# Altium PCB Wi-FiR.PcbDoc (part 1 of 3)
Units mm, origin at the board's own origin, x right, y up, seen from the top; angles counter-clockwise.
Board outline 58.03 x 53.68 mm, 2 copper layers (Top Layer, Bottom Layer); 105 components, 77 nets, 361 pads, 200 vias.
Unrouted connection lines stored in the file: 1.
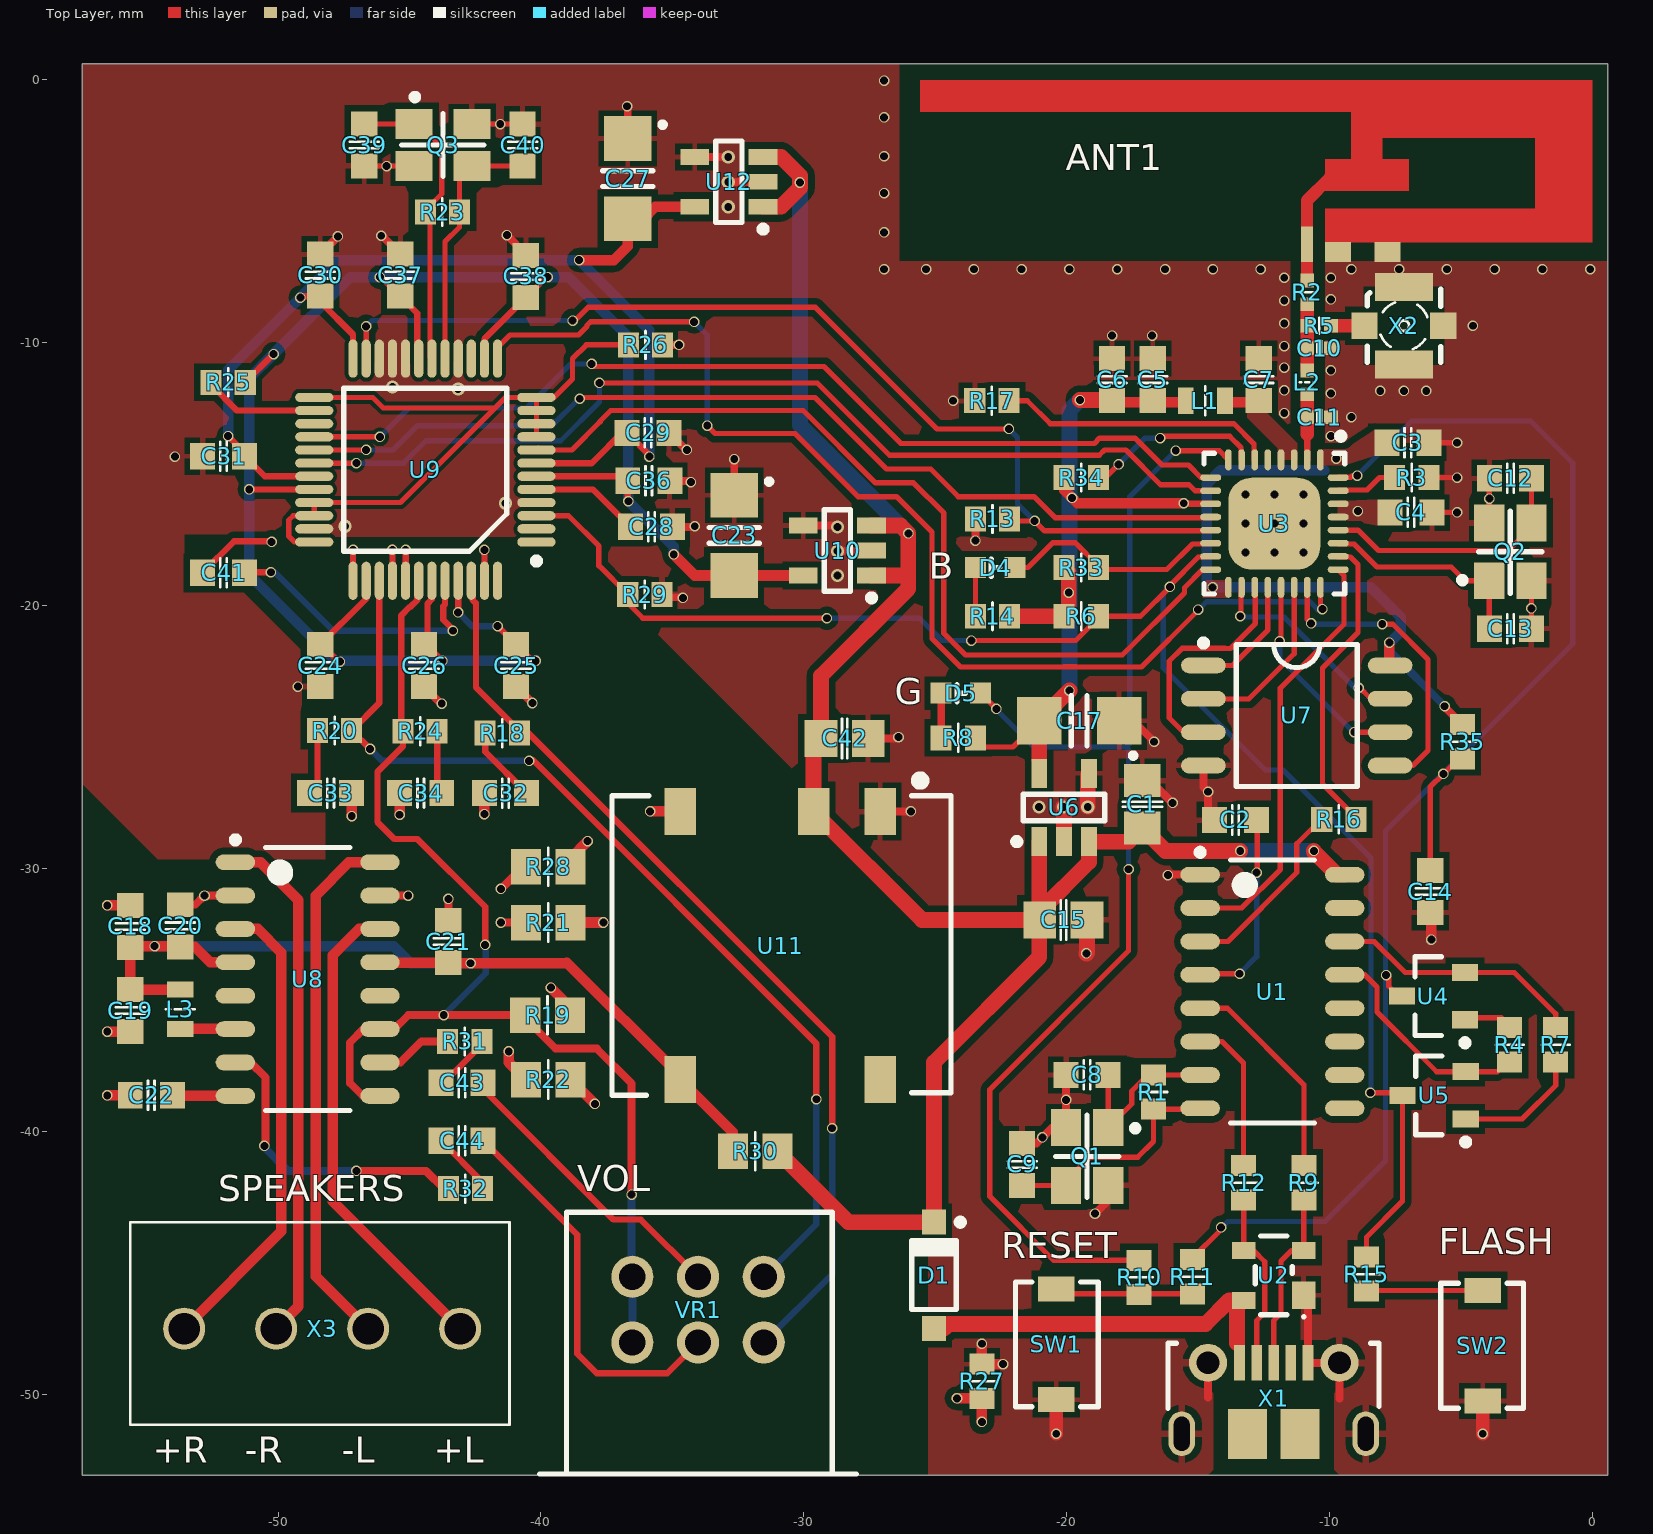
[diagram p0: Top Layer view]
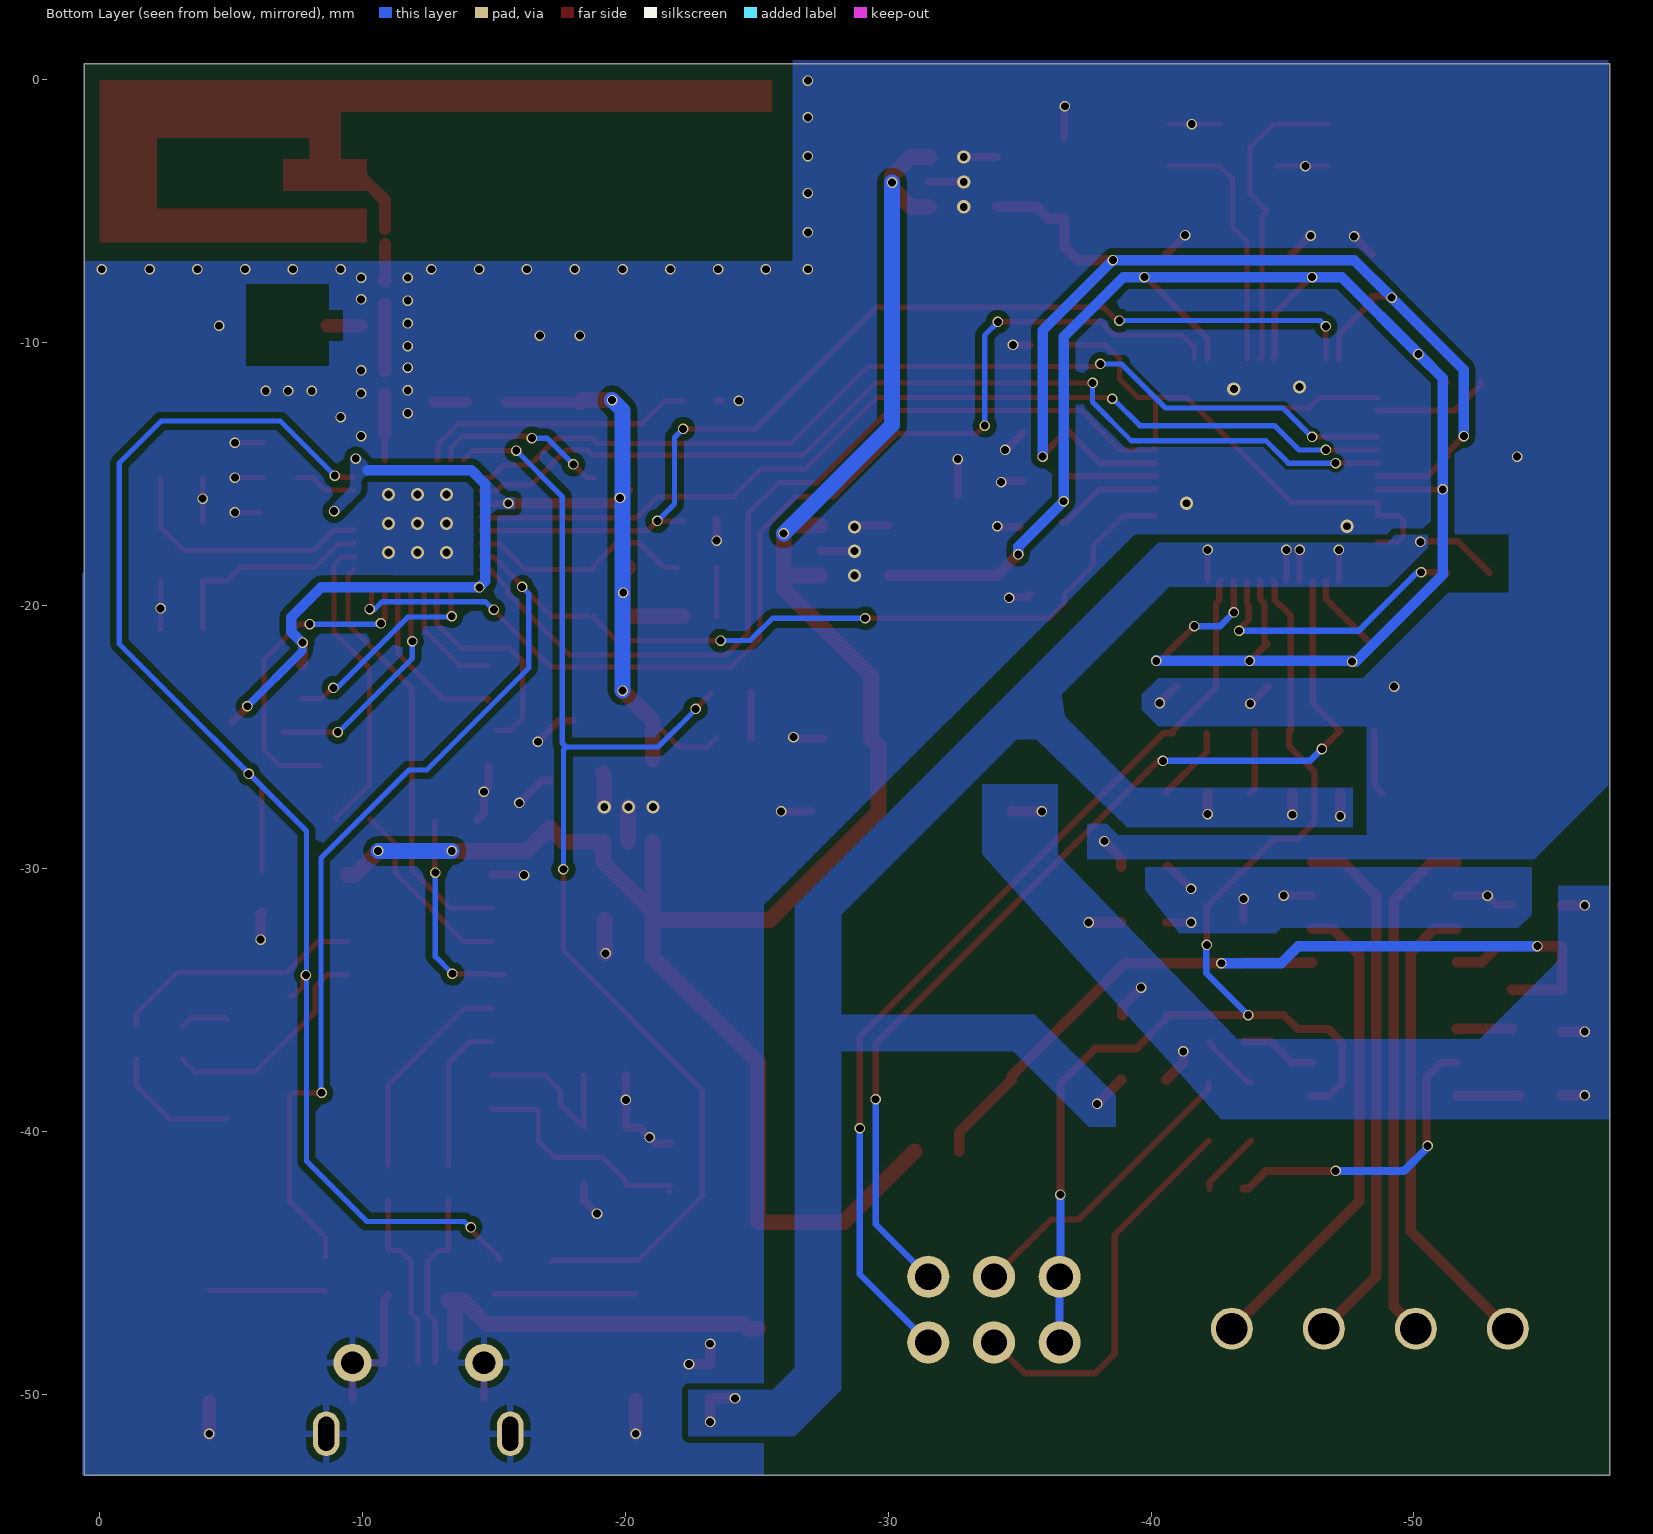
[diagram p1: Bottom Layer view, seen from below]
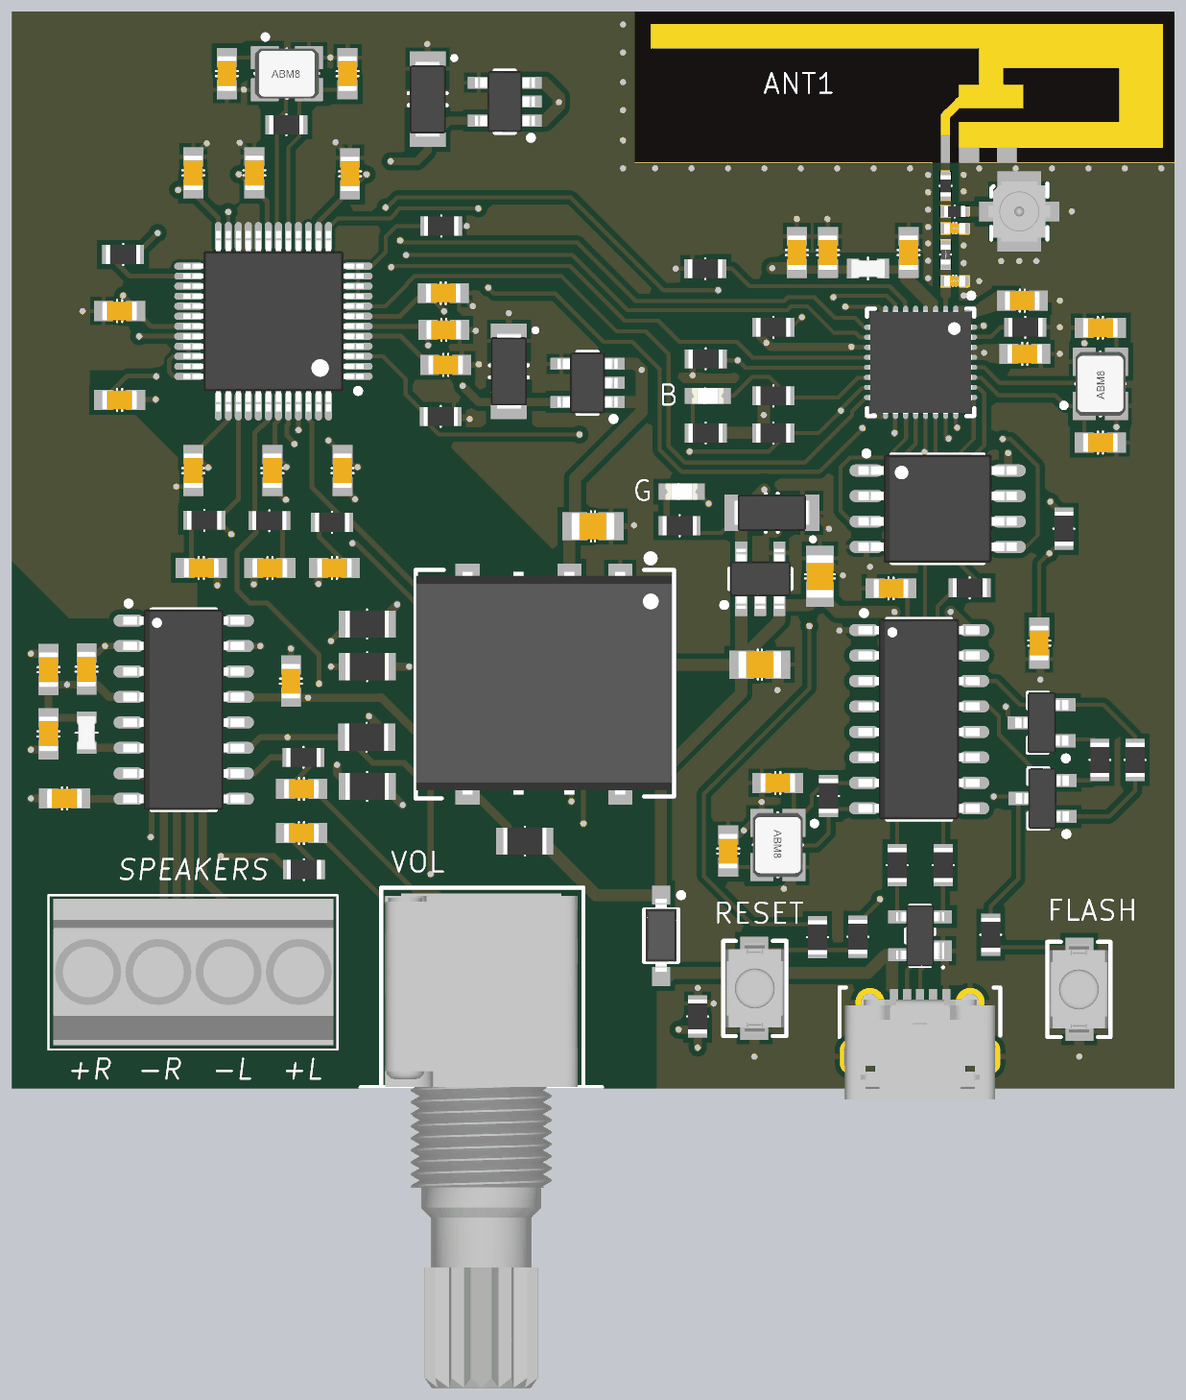
[diagram p3: 3D render of the assembled board from above, using the file's embedded part models]

## Layer stack, top to bottom
Top Solder: solder mask 0.0102, Solder Resist, Dk 3.5
Top Layer: signal copper 0.0356
Dielectric 1: dielectric 0.32, FR-4, Dk 4.8
Bottom Layer: signal copper 0.0356
Bottom Solder: solder mask 0.0102, Solder Resist, Dk 3.5

## Board outline
-57.45,-53.075 0.575,-53.075 0.575,0.61 -57.45,0.61

## Design rules (kind name [scope] priority, off if disabled: settings)
Clearance Clearance_VS [WithinRoom('VS')] p1: gap=0.15 ignorepadtopadclearanceinfootprint=TRUE
Clearance Clearance_via_to_via [InViaShielding] p2: gap=0.1 ignorepadtopadclearanceinfootprint=TRUE
Clearance Clearance_ANT [InComponent('ANT1') AND InNet('NetANT1_1') vs InNet('NetANT1_1') AND InPoly AND InNet('GND')] p3: gap=0 ignorepadtopadclearanceinfootprint=TRUE
Clearance Clearance_USB [InComponent('X1')] p4: gap=0 ignorepadtopadclearanceinfootprint=TRUE
Clearance [All] p5: gap=0.25 ignorepadtopadclearanceinfootprint=TRUE
PolygonConnect PolygonConnect_CONN [InNamedPolygon('GND_CONN_TOP')] p1: thpad.connectstyle=Relief thpad.reliefconductorwidth=0.254 thpad.reliefentries=4 thpad.polygonreliefangle="90 Angle" thpad.airgapwidth=0.254 smdpad.connectstyle=Direct smdpad.reliefconductorwidth=0.254 smdpad.reliefentries=4 smdpad.polygonreliefangle="90 Angle" smdpad.airgapwidth=0.254 via.connectstyle=Relief via.reliefconductorwidth=0.254 via.reliefentries=4 via.polygonreliefangle="90 Angle" via.airgapwidth=0.254
PolygonConnect [All] p2: thpad.connectstyle=Relief thpad.reliefconductorwidth=0.254 thpad.reliefentries=4 thpad.polygonreliefangle="90 Angle" thpad.airgapwidth=0.254 smdpad.connectstyle=Relief smdpad.reliefconductorwidth=0.2 smdpad.reliefentries=4 smdpad.polygonreliefangle="90 Angle" smdpad.airgapwidth=0.2 via.connectstyle=Direct via.reliefconductorwidth=0.254 via.reliefentries=4 via.polygonreliefangle="90 Angle" via.airgapwidth=0.254
RoomDefinition VS [InComponentClass('Components Class 1')] p1: confinementstyle=ConfineIn formatcopy=TRUE lockcomponents=FALSE outline -49.725,-20.125 -38.8,-20.125 -38.8,-9.575 -49.725,-9.575
RoutingVias [All] p1: holewidth=0.3 width=0.4 viastyle="Through Hole" minholewidth=0.3 minwidth=0.4 maxholewidth=0.711 maxwidth=1.27
SolderMaskExpansion [InComponent('U9')] p1: expansion=0.05
Width [All] p1: maxlimit=1 minlimit=0.2 preferedwidth=0.254
30 further rules are at their usual default settings.

## Components (designator, comment, footprint, x,y, rotation, side; value= is the part's Value field where it differs from the comment)
ANT1 "ANT" ? -10.18,-6.915 r0 top
C1 "0.1uF" "CAP 0805" -17.125,-27.55 r270 top
C2 "0.01uF" "CAP 0603" -13.575,-28.15 r180 top
C3 "1uF" "CAP 0603" -7.025,-13.8 r180 top
C4 "1uF" "CAP 0603" -6.9,-16.45 r180 top
C5 "10uF" "CAP 0603" -16.725,-11.4 r270 top
C6 "0.1uF" "CAP 0603" -18.275,-11.4 r270 top
C7 "1uF" "CAP 0603" -12.7,-11.4 r270 top
C8 "22pF" "CAP 0603" -19.225,-37.85 r0 top
C9 "22pF" "CAP 0603" -21.7,-41.25 r270 top
C10 "2p4" "CAP 0402" -10.4,-10.2 r180 top
C11 "3pF" "CAP 0402" -10.4,-12.825 r180 top
C12 "6p8" "CAP 0603" -3.125,-15.15 r0 top
C13 "6p8" "CAP 0603" -3.125,-20.875 r180 top
C14 "0.1uF" "CAP 0603" -6.175,-30.875 r90 top
C15 "0.1uF" "CAP 0805" -20.125,-31.95 r180 top
C17 "10uF" "CAP 1206" -19.525,-24.375 r180 top
C18 "10uF" "CAP 0603" -55.625,-32.2 r270 top
C19 "0.1uF" "CAP 0603" -55.625,-35.4 r90 top
C20 "0.1uF" "CAP 0603" -53.725,-32.175 r270 top
C21 "0.1uF" "CAP 0603" -43.525,-32.775 r270 top
C22 "0.1uF" "CAP 0603" -54.825,-38.625 r180 top
C23 "10uF" "CAP 1206" -32.65,-17.325 r270 top
C24 "0.1uF" "CAP 0603" -48.4,-22.275 r90 top
C25 "0.1uF" "CAP 0603" -40.95,-22.275 r90 top
C26 "0.1uF" "CAP 0603" -44.45,-22.275 r90 top
C27 "10uF" "CAP 1206" -36.7,-3.75 r270 top
C28 "0.1uF" "CAP 0603" -35.8,-17 r180 top
C29 "0.1uF" "CAP 0603" -35.925,-13.425 r180 top
C30 "0.1uF" "CAP 0603" -48.4,-7.425 r270 top
C31 "0.1uF" "CAP 0603" -52.075,-14.313 r0 top
C32 "0.01uF" "CAP 0603" -41.35,-27.125 r180 top
C33 "0.01uF" "CAP 0603" -48,-27.125 r0 top
C34 "47nF" "CAP 0603" -44.575,-27.125 r180 top
C36 "0.1uF" "CAP 0603" -35.9,-15.25 r180 top
C37 "0.1uF" "CAP 0603" -45.35,-7.425 r270 top
C38 "0.1uF" "CAP 0603" -40.575,-7.475 r270 top
C39 "33pF" "CAP 0603" -46.725,-2.475 r90 top
C40 "33pF" "CAP 0603" -40.7,-2.475 r270 top
C41 "1uF" "CAP 0603" -52.075,-18.75 r0 top
C42 "10uF" "CAP 0805" -28.45,-25.05 r180 top
C43 "47nF" "CAP 0603" -43,-38.15 r180 top
C44 "47nF" "CAP 0603" -43,-40.35 r180 top
D1 "1N5819" "SOD123 DIODE" -25.05,-45.475 r270 top
D4 "B" "LED 0603" -22.725,-18.55 r180 top (schematic designator D5)
D5 "G" "LED 0603" -24.025,-23.325 r180 top (schematic designator D4)
L1 "4n3" "IND 0603 LQW" -14.725,-12.2 r0 top
L2 "2n2" "IND 0402" -10.85,-11.5 r270 top
L3 "4n3" "IND 0603 LQW" -53.725,-35.35 r270 top
Q1 "12MHz" ABM8W -19.225,-40.95 r270 top
Q2 "26MHz" ABM8W -3.125,-17.95 r90 top
Q3 "12.288MHZ" ABM8W -43.725,-2.475 r0 top
R1 "1M" "RES 0603" -16.7,-38.5 r270 top
R2 "0R" "RES 0405 - JUMPER" -10.85,-8.075 r270 top
R3 "12K" "RES 0603" -6.875,-15.125 r0 top
R4 "12K" "RES 0603" -3.15,-36.7 r270 top
R5 "0R" "RES 0405 - JUMPER" -10.4,-9.35 r180 top
R6 "10K" "RES 0603" -19.45,-20.4 r0 top
R7 "12K" "RES 0603" -1.4,-36.7 r90 top
R8 "470R" "RES 0603" -24.125,-25.025 r0 top
R9 "20R" "RES 0603" -10.975,-41.95 r90 top
R10 "0R" "RES 0603 - JUMPER" -17.25,-45.55 r270 top
R11 "470R" "RES 0603" -15.225,-45.525 r90 top
R12 "20R" "RES 0603" -13.275,-41.95 r90 top
R13 "12K" "RES 0603" -22.825,-16.7 r0 top
R14 "2k2" "RES 0603" -22.825,-20.4 r180 top
R15 "470R" "RES 0603" -8.6,-45.425 r270 top
R16 "499R" "RES 0603" -9.65,-28.125 r180 top
R17 "0R" "RES 0603 - JUMPER" -22.85,-12.2 r0 top
R18 "20R" "RES 0603" -41.475,-24.85 r180 top
R19 "0R" "RES 0805 - JUMPER" -39.75,-35.575 r0 top
R20 "20R" "RES 0603" -47.85,-24.75 r180 top
R21 "0R" "RES 0805 - JUMPER" -39.725,-32.05 r180 top
R22 "0R" "RES 0805 - JUMPER" -39.725,-38.025 r180 top
R23 "1M" "RES 0603" -43.75,-5.025 r0 top
R24 "10R" "RES 0603" -44.6,-24.775 r0 top
R25 "100K" "RES 0603" -51.9,-11.5 r180 top
R26 "100K" "RES 0603" -36.025,-10.075 r180 top
R27 "0R" "RES 0603 - JUMPER" -23.225,-49.5 r270 top
R28 "0R" "RES 0805 - JUMPER" -39.725,-29.925 r180 top
R29 "100K" "RES 0603" -36.05,-19.575 r180 top
R30 "0R" "RES 0805 - JUMPER" -31.85,-40.75 r180 top
R31 "10K" "RES 0603" -42.9,-36.575 r180 top
R32 "10K" "RES 0603" -42.875,-42.175 r180 top
R33 "10K" "RES 0603" -19.45,-18.55 r0 top
R34 "10K" "RES 0603" -19.45,-15.125 r0 top
R35 "10K" "RES 0603" -4.95,-25.175 r270 top
SW1 "RESET" "SWITCH MICRO" -20.4,-48.075 r90 top
SW2 "FLASH" "SWITCH MICRO" -4.175,-48.175 r270 top
U1 "CH340G" SOP-16 -12.175,-34.675 r0 top
U2 "ESD" SOT143 -12.125,-45.475 r180 top
U3 "ESP8266EX" "QFN-32 THERMAL" -12.1,-16.875 r270 top
U4 "S8050" SOT-23 -6.05,-34.85 r180 top
U5 "S8050" SOT-23 -6.025,-38.625 r180 top
U6 "3.3V" SOT-23-5 -20.1,-27.675 r90 top
U7 "FLASH" "SOIC-8 208-MIL" -11.25,-24.175 r0 top
U8 "PAM8403" SOP-16 -48.875,-34.2 r0 top
U9 "VS1053B" LQFP-48 -44.4,-14.825 r180 top
U10 "3.3V" SOT-23-5 -28.725,-17.9 r180 top
U11 "DC-DC 5V-5V" "R1SE DC/DC" -30.9,-32.925 r270 top
U12 "1.8V" SOT-23-5 -32.85,-3.875 r180 top
VR1 "VOL" "POT PTD902" -31.525,-45.525 r270 top
X1 "mocroUSB" MICROUSB -12.123,-51.304 r0 top
X2 "ANT" "U.FL CONNECTOR" -7.175,-9.35 r270 top
X3 "0393570004" "TRMINAL 3.5MM" -43.075,-47.5 r180 top

## Footprints (in the part's own frame and the unit in brackets; to place one, negate y for a bottom-side part, rotate by r counter-clockwise, add the part's x,y. Pads: shape width x height; smd on the part's side, far side on the other; paste and mask are expansions set on the pad)
ABM8W [mm] "4-Leads, Body 2.50x3.20mm, Pitch 2.20mm, IPC Medium Density"
  rect 1.4x1.15 smd: 1(-1.1,0.8) 2(1.1,0.8) 3(1.1,-0.8) 4(-1.1,-0.8)
  silkscreen extent -1.58,-1.2 1.55,1.86, body extent -1.6,-1.24 1.6,1.24, height 0.8
"CAP 0402" [mm]
  rect 0.52x0.52 smd mask+0.05: 1(-0.45,0) 2(0.45,0)
  silkscreen extent -0.08,-0.28 0.08,0.25, body extent -0.52,-0.28 0.52,0.28, height 0.56
"CAP 0603" [mm] "Chip Capacitor, 2-Leads, Body 1.60x0.82mm, IPC Medium Density"
  rect 0.95x1 smd: 1(-0.8,0) 2(0.8,0)
  silkscreen extent -0.13,-0.55 0.13,0.55, body extent -0.87,-0.47 0.88,0.48, height 0.95
"CAP 0805" [mm] "Chip Capacitor, 2-Leads, Body 1.95x1.25mm, IPC Medium Density"
  rect 1.25x1.4 smd: 1(-0.9,0) 2(0.9,0)
  silkscreen extent -0.1,-0.75 0.1,0.75, body extent -1.07,-0.67 1.08,0.68, height 1.35
"CAP 1206" [mm] "Molded Capacitor, 2-Leads, Body 3.20x1.60mm, IPC Medium Density"
  rect 1.7x1.8 smd: 1(1.525,0) 2(-1.525,0)
  silkscreen extent -2.15,-0.95 0.3,1.42, body extent -1.92,-0.9 1.92,0.9, height 1.8
"IND 0402" [mm]
  rect 0.52x0.52 smd mask+0.05: 1(-0.45,0) 2(0.45,0)
  silkscreen extent 0,-0.28 0,0.28, body extent -0.5,-0.25 0.5,0.25, height 0.51
"IND 0603 LQW" [mm]
  rect 0.6x1 smd: 1(-0.75,0) 2(0.75,0)
  silkscreen extent 0,-0.55 0,0.55, body extent -0.82,-0.49 0.83,0.49, height 1
"LED 0603" [mm]
  rect 0.8x0.8 smd: 1(0.75,0) 2(-0.75,0)
  silkscreen extent -0.18,-0.33 0.15,0.33, body extent -0.8,-0.4 0.8,0.4, height 0.8
LQFP-48 [mm] "LQFP, 48-Leads, Body 7.00x7.00mm, Pitch 0.50mm, IPC Medium Density"
  oval 1.45x0.35 smd: 1(-4.225,2.75) 2(-4.225,2.25) 3(-4.225,1.75) 4(-4.225,1.25) 5(-4.225,0.75) 6(-4.225,0.25) 7(-4.225,-0.25) 8(-4.225,-0.75) 9(-4.225,-1.25) 10(-4.225,-1.75) 11(-4.225,-2.25) 12(-4.225,-2.75) 25(4.225,-2.75) 26(4.225,-2.25) 27(4.225,-1.75) 28(4.225,-1.25) 29(4.225,-0.75) 30(4.225,-0.25) 31(4.225,0.25) 32(4.225,0.75) 33(4.225,1.25) 34(4.225,1.75) 35(4.225,2.25) 36(4.225,2.75)
  oval 0.35x1.45 smd: 13(-2.75,-4.225) 14(-2.25,-4.225) 15(-1.75,-4.225) 16(-1.25,-4.225) 17(-0.75,-4.225) 18(-0.25,-4.225) 19(0.25,-4.225) 20(0.75,-4.225) 21(1.25,-4.225) 22(1.75,-4.225) 23(2.25,-4.225) 24(2.75,-4.225) 37(2.75,4.225) 38(2.25,4.225) 39(1.75,4.225) 40(1.25,4.225) 41(0.75,4.225) 42(0.25,4.225) 43(-0.25,4.225) 44(-0.75,4.225) 45(-1.25,4.225) 46(-1.75,4.225) 47(-2.25,4.225) 48(-2.75,4.225)
  silkscreen extent -4.35,-3.1 3.1,3.6, body extent -4.5,-4.5 4.5,4.5, height 1.85
MICROUSB [mil]
  rect 16x53 smd paste+0 mask+0: 1(-51.24,98.57) 2(-25.65,98.57) 3(-0.06,98.57) 4(25.53,98.57) 5(51.12,98.57)
  oval 39.37x66.93 hole 23.62 slot 51.18 at 90 deg: 5(-137.86,-7.73) 5(137.73,-7.73)
  round 57 hole 34: 5(-98.49,98.57) 5(98.36,98.57)
  rect 59x75 smd: 8(-39.43,-7.73) 9(39.31,-7.73)
  Multi-Layer lines w24: -137.86,-21.23 -137.86,-7.73 -137.86,5.77 ; 137.73,-21.23 137.73,-7.73 137.73,5.77
  silkscreen extent -158,31 157,128, body extent -148,-93 148,104, height 107
"POT PTD902" [mm]
  round 1.6 hole 1: 1(0,-5) 1'(2.5,-5) 2(0,-2.5) 2'(2.5,-2.5) 3(0,0) 3'(2.5,0)
  silkscreen extent -2.45,-8.52 7.5,3.52, body extent -2.15,-7.3 22.5,2.3, height 11.36
"QFN-32 THERMAL" [mm] "QFN, 32-Leads, Body 5.00x5.00mm, Pitch 0.50mm, Thermal Pad 3.70x3.70mm, IPC Medium Density"
  oval 0.8x0.25 smd: 1(-2.425,1.75) 2(-2.425,1.25) 3(-2.425,0.75) 4(-2.425,0.25) 5(-2.425,-0.25) 6(-2.425,-0.75) 7(-2.425,-1.25) 8(-2.425,-1.75) 17(2.425,-1.75) 18(2.425,-1.25) 19(2.425,-0.75) 20(2.425,-0.25) 21(2.425,0.25) 22(2.425,0.75) 23(2.425,1.25) 24(2.425,1.75)
  oval 0.25x0.8 smd: 9(-1.75,-2.425) 10(-1.25,-2.425) 11(-0.75,-2.425) 12(-0.25,-2.425) 13(0.25,-2.425) 14(0.75,-2.425) 15(1.25,-2.425) 16(1.75,-2.425) 25(1.75,2.425) 26(1.25,2.425) 27(0.75,2.425) 28(0.25,2.425) 29(-0.25,2.425) 30(-0.75,2.425) 31(-1.25,2.425) 32(-1.75,2.425)
  rrect50% 3.5x3.5 smd: 33(0,0)
  silkscreen extent -3.45,-2.68 2.68,2.67, body extent -2.58,-2.58 2.58,2.58, height 0.9
"R1SE DC/DC" [mm]
  rect 1.8x1.2 smd: 1(-5.1,3.81) 2(-5.1,1.27) 4(-5.1,-3.81) 5(5.1,-3.81) 8(5.1,3.81)
  silkscreen extent -6.42,-6.4 5.7,6.5, body extent -5.6,-6.38 5.5,6.38, height 7.01
"RES 0405 - JUMPER" [mm] "Chip Resistor, 2-Leads, Body 1.00x0.50mm, IPC Medium Density"
  rect 0.52x0.52 smd mask+0.05: 1(-0.45,0) 2(0.45,0)
  silkscreen extent 0,-0.3 0,0.3, body extent -0.52,-0.27 0.53,0.28, height 0.4
"RES 0603" [mm] "Chip Resistor, 2-Leads, Body 1.60x0.85mm, IPC Medium Density"
  rect 0.8x0.95 smd: 1(-0.65,0) 2(0.65,0)
  silkscreen extent 0,-0.53 0,0.53, body extent -0.85,-0.48 0.85,0.48, height 0.55
"RES 0603 - JUMPER" [mm] "Chip Resistor, 2-Leads, Body 1.60x0.85mm, IPC Medium Density"
  rect 0.8x0.95 smd: 1(-0.65,0) 2(0.65,0)
  silkscreen extent 0,-0.53 0,0.53, body extent -0.85,-0.47 0.85,0.48, height 0.55
"RES 0805 - JUMPER" [mm] "Chip Resistor, 2-Leads, Body 1.95x1.20mm, IPC Medium Density"
  rect 1.15x1.35 smd: 1(-0.85,0) 2(0.85,0)
  silkscreen extent 0,-0.72 0,0.72, body extent -1.07,-0.67 1.08,0.68, height 0.6
"SOD123 DIODE" [mm] "2-Leads, Body 1.55x2.70mm, IPC Medium Density"
  rect 0.95x0.9 smd: 1(2.025,0) 2(-2.025,0)
  silkscreen extent -2.15,-0.9 1.3,1.13, body extent -1.85,-0.78 1.8,0.77, height 1.53
"SOIC-8 208-MIL" [mm] "SOIC, 8-Leads, Body 5.28x5.28mm, Pitch 1.27mm, IPC Medium Density"
  oval 1.7x0.6 smd: 1(-3.55,1.905) 2(-3.55,0.635) 3(-3.55,-0.635) 4(-3.55,-1.905) 5(3.55,-1.905) 6(3.55,-0.635) 7(3.55,0.635) 8(3.55,1.905)
  silkscreen extent -3.67,-2.7 2.3,2.88, body extent -3.95,-2.7 3.95,2.7, height 2.16
SOP-16 [mm] "SOP, 16-Leads, Body 9.90x3.90mm, Pitch 1.27mm, IPC Medium Density"
  oval 1.5x0.6 smd: 1(-2.75,4.445) 2(-2.75,3.175) 3(-2.75,1.905) 4(-2.75,0.635) 5(-2.75,-0.635) 6(-2.75,-1.905) 7(-2.75,-3.175) 8(-2.75,-4.445) 9(2.75,-4.445) 10(2.75,-3.175) 11(2.75,-1.905) 12(2.75,-0.635) 13(2.75,0.635) 14(2.75,1.905) 15(2.75,3.175) 16(2.75,4.445)
  silkscreen extent -2.87,-5 1.6,5.42, body extent -3.03,-5 3.03,5, height 1.75
SOT143 [mm] "SOT143, 4-Leads, Body 2.92x2.29mm, Pitch 1.90mm, IPC Medium Density"
  rect 0.9x1.05 smd: 1(-1.145,0.75)
  rect 0.9x0.65 smd: 2(-1.145,-0.95) 3(1.145,-0.95) 4(1.145,0.95)
  silkscreen extent -1.19,-1.5 0.7,1.62, body extent -1.2,-1.52 1.2,1.52, height 1.14
SOT-23 [mm] "SOT23, 3-Leads, Body 2.92x2.37mm, Pitch 0.90mm, IPC Medium Density"
  rect 1x0.65 smd: 1(-1.2,0.9) 2(-1.2,-0.9) 3(1.2,0)
  silkscreen extent -1.33,-1.5 0.7,1.9, body extent -1.32,-1.52 1.32,1.52, height 1.12
SOT-23-5 [mm] "SOT23, 5-Leads, Body 2.90x2.80mm, Pitch 0.95mm, IPC Medium Density"
  rect 1.1x0.6 smd: 1(-1.3,0.95) 2(-1.3,0) 3(-1.3,-0.95) 4(1.3,-0.95) 5(1.3,0.95)
  silkscreen extent -1.42,-1.55 0.5,1.92, body extent -1.5,-1.53 1.5,1.53, height 1.45
"SWITCH MICRO" [mm]
  rect 0.95x1.4 smd: 1(-2.125,0) 2(2.075,0)
  silkscreen extent -2.4,-1.6 2.35,1.55, body extent -2.27,-1.47 2.23,1.43, height 2.05
"TRMINAL 3.5MM" [mm]
  round 1.6 hole 1.2: 1(10.5,0) 2(7,0) 3(3.5,0) 4(0,0)
  silkscreen extent -1.88,-4.05 12.55,3.65, body extent -1.66,-3.86 12.31,3.43, height 8.51
"U.FL CONNECTOR" [mm]
  rect 1x1 smd: 1(0,-1.5) 3(0,1.5)
  rect 1.05x2.2 smd: 2(-1.475,0) 4(1.475,0)
  silkscreen extent -1.4,-1.4 1.4,1.4, body extent -1.5,-1.54 1.5,1.54, height 1.3
? [mm]
  rect 0.46x1.346 smd paste+0 mask+0: 1(-0.675,0.665)
  rect 1x0.75 smd paste+0 mask+0: 1(0.5,0.375) 1(2.38,0.375)
  Top Layer region: 2.2,5.74 1,5.74 1,3.835 2.2,3.835
  Top Layer region: 3.2,3.9 0,3.9 0,2.69 3.2,2.69
  Top Layer region: 8,5.78 2.2,5.78 2.2,4.7 8,4.7
  Top Layer region: 10.18,2.03 0,2.03 0,0.74 10.18,0.74
  Top Layer region: 10.18,5.7 8,5.7 8,2.03 10.18,2.03
  Top Layer region: 10.18,6.91 -15.4,6.91 -15.4,5.7 10.18,5.7
  Top Layer lines w0.46: -0.68,1.25 -0.68,2.33 0.168,3.178

## Part data
ANT1: library part "ANT WI-FI PCB 2.4GHz", "ANT WIFI PCB TRACE ANTENNA 2.4GHz"
C1 C15: library part VJ0805Y104KXAAT, "CAP CER 0.1uF 0805 50V X7R", Capacitance=100nF, Case/Package=0805, Case Code (Metric)=2012, Dielectric=X7R, Manufacturer="Vishay Vitramon", Max Operating Temperature=125°C, Min Operating Temperature=-55°C, Package Quantity=1, Supplier Part Number 1=720-1383-1-ND, Tolerance=10%, Voltage=50V, Case Code (Imperial)=0805, ComponentLink1Description=http://www.mouser.com/ds/2/427/vjcommercialseries-222796.pdf?src-supplier=Mouser, ComponentLink1URL=http://www.mouser.com/ds/2/427/vjcommercialseries-222796.pdf?src-supplier=Mouser, ComponentLink2Description=http://www.vishay.com/docs/45199/vjcommercialseries.pdf?src-supplier=Digi-Key, ComponentLink2URL=http://www.vishay.com/docs/45199/vjcommercialseries.pdf?src-supplier=Digi-Key, ComponentLink3Description=http://www.vishay.com/docs/45199/vjcommercialseries.pdf?src-supplier=Future+Electronics, ComponentLink3URL=http://www.vishay.com/docs/45199/vjcommercialseries.pdf?src-supplier=Future+Electronics, Depth=1.25mm, Height=1.45mm, Lead Free="Lead Free", Length=2mm, Manufacturer Part Number=VJ0805Y104KXAAT, Mount="Surface Mount", Packaging="Tape and Reel", Radiation Hardening=No, REACH SVHC=Unknown, Stock 1=145518, Supplier 1=Digi-Key, Termination=SMD/SMT, Thickness=0.057inch, Voltage Rating=50V, Voltage Rating (DC)=50V, Weight=0.000194oz, Width=0.049inch
C2 C32 C33: library part VJ0603Y103KXAAC, "CAP CER 0.01uF 0603 10 nF 50 V ±10 % Tolerance X7R SMT Multilayer Ceramic Chip Capacitor", Capacitance=10nF, Case/Package=0603, Case Code (Metric)=1608, Dielectric=X7R, Manufacturer="Vishay Vitramon", Max Operating Temperature=125°C, Min Operating Temperature=-55°C, Package Quantity=4000, Supplier Part Number 1=720-1376-1-ND, Tolerance=10%, Voltage=50V, Case Code (Imperial)=0603, ComponentLink1Description=http://www.farnell.com/datasheets/1805045.pdf?src-supplier=Element14, ComponentLink1URL=http://www.farnell.com/datasheets/1805045.pdf?src-supplier=Element14, ComponentLink2Description=http://www.farnell.com/datasheets/2049137.pdf?src-supplier=Element14, ComponentLink2URL=http://www.farnell.com/datasheets/2049137.pdf?src-supplier=Element14, ComponentLink3Description=http://www.farnell.com/datasheets/50102.pdf?src-supplier=Element14, ComponentLink3URL=http://www.farnell.com/datasheets/50102.pdf?src-supplier=Element14, ComponentLink4Description=http://www.vishay.com/docs/45051/vjvitramonpackaging.pdf?src-supplier=Digi-Key, ComponentLink4URL=http://www.vishay.com/docs/45051/vjvitramonpackaging.pdf?src-supplier=Digi-Key, Contact Plating=Tin,Matte, Depth=0.8mm, Height=0.92mm, Lead Free="Lead Free", Length=1.6mm, Manufacturer Part Number=VJ0603Y103KXAAC, Mount="Surface Mount", Number of Pins=2, Packaging="Tape and Reel", Pricing 1="1=0.26, 10=0.179, 100=0.1013, 500=0.0715, 1000=0.0625 (USD)", Radiation Hardening=No, REACH SVHC=Unknown, Stock 1=728512, Supplier 1=Digi-Key, Termination=SMD/SMT, Thickness=0.036inch, Voltage Rating=50V, Voltage Rating (DC)=50V, Weight=7.1E-05oz, Width=0.031inch
C3 C4 C7 C41: library part VJ0603Y105KXJCW1BC, "CAP CER 1uF 0603 16V X7R 10% SMD 125C Paper T/R", Case/Package=0603, Dielectric=X7R, Dielectric Material=Tantalum, Manufacturer="Vishay Semiconductors", Max Operating Temperature=125°C, Min Operating Temperature=-55°C, Supplier Part Number 1=720-1852-1-ND, Tolerance=10%, Voltage Rating (DC)=16V, Capacitance=1uF, ComponentLink1Description=http://www.vishay.com/docs/28548/vjw1bcbascomseries.pdf?src-supplier=Avnet, ComponentLink1URL=http://www.vishay.com/docs/28548/vjw1bcbascomseries.pdf?src-supplier=Avnet, ComponentLink2Description=http://www.vishay.com/docs/28548/vjw1bcbascomseries.pdf?src-supplier=Avnet+Europe, ComponentLink2URL=http://www.vishay.com/docs/28548/vjw1bcbascomseries.pdf?src-supplier=Avnet+Europe, Depth=0.8mm, Lead Free="Lead Free", Length=1.6mm, Manufacturer Part Number=VJ0603Y105KXJCW1BC, Mount="Surface Mount", Packaging="Tape and Reel", Pricing 1="1=0.29, 10=0.196, 100=0.0991, 500=0.0678, 1000=0.06 (USD)", Radiation Hardening=No, Stock 1=970843, Supplier 1=Digi-Key
C5 C18: library part C0603C106M9PACTU, "CAP CER 10UF 0603 6.3V", Case/Package=0603, Dielectric=X5R, Dielectric Material=Ceramic, Manufacturer=KEMET, Max Operating Temperature=85°C, Min Operating Temperature=-55°C, Supplier Part Number 1=399-5504-1-ND, Tolerance=20%, Voltage=6.3V, Capacitance=10uF, ComponentLink1Description=http://www.farnell.com/datasheets/2739682.pdf?src-supplier=Farnell, ComponentLink1URL=http://www.farnell.com/datasheets/2739682.pdf?src-supplier=Farnell, ComponentLink2Description=http://uk.rs-online.com/webdocs/1515/0900766b8151511d.pdf?src-supplier=RSComponents, ComponentLink2URL=http://uk.rs-online.com/webdocs/1515/0900766b8151511d.pdf?src-supplier=RSComponents, ComponentLink3Description=http://www.farnell.com/datasheets/1918694.pdf?src-supplier=Farnell, ComponentLink3URL=http://www.farnell.com/datasheets/1918694.pdf?src-supplier=Farnell, ComponentLink4Description=http://www.farnell.com/datasheets/2315129.pdf?src-supplier=RSComponents, ComponentLink4URL=http://www.farnell.com/datasheets/2315129.pdf?src-supplier=RSComponents, ComponentLink5Description=http://www.kemet.com/kemet/web/homepage/kechome.nsf/weben/ADB5E2666EC6BA90CA2570A50016092E/$file/KEM_C1005_Y5V_SMD.pdf?src-supplier=Avnet, ComponentLink5URL=http://www.kemet.com/kemet/web/homepage/kechome.nsf/weben/ADB5E2666EC6BA90CA2570A50016092E/$file/KEM_C1005_Y5V_SMD.pdf?src-supplier=Avnet, ComponentLink6Description=http://www.farnell.com/datasheets/2315129.pdf?src-supplier=Verical, ComponentLink6URL=http://www.farnell.com/datasheets/2315129.pdf?src-supplier=Verical, ComponentLink7Description=http://www.farnell.com/datasheets/2739682.pdf?src-supplier=Newark, ComponentLink7URL=http://www.farnell.com/datasheets/2739682.pdf?src-supplier=Newark, ComponentLink8Description=https://api.kemet.com/component-edge/download/datasheet/C0603C106M9PACTU.pdf?src-supplier=Digi-Key, ComponentLink8URL=https://api.kemet.com/component-edge/download/datasheet/C0603C106M9PACTU.pdf?src-supplier=Digi-Key, ComponentLink9Description=http://www.farnell.com/datasheets/2123796.pdf?src-supplier=Element14, ComponentLink9URL=http://www.farnell.com/datasheets/2123796.pdf?src-supplier=Element14, ComponentLink10Description=http://www.farnell.com/datasheets/2315129.pdf?src-supplier=Avnet+Asia, ComponentLink10URL=http://www.farnell.com/datasheets/2315129.pdf?src-supplier=Avnet+Asia, ComponentLink11Description=http://www.farnell.com/datasheets/2315129.pdf?src-supplier=Allied+Electronics, ComponentLink11URL=http://www.farnell.com/datasheets/2315129.pdf?src-supplier=Allied+Electronics, ComponentLink12Description=http://components.arrow.com/part/dataview/0323_00011321?src-supplier=Arrow+Europe, ComponentLink12URL=http://components.arrow.com/part/dataview/0323_00011321?src-supplier=Arrow+Europe, ComponentLink13Description=http://components.arrow.com/part/dataview/42932973S8313645N7429?src-supplier=Arrow, ComponentLink13URL=http://components.arrow.com/part/dataview/42932973S8313645N7429?src-supplier=Arrow, ComponentLink14Description=http://www.farnell.com/datasheets/2315129.pdf?src-supplier=Mouser, ComponentLink14URL=http://www.farnell.com/datasheets/2315129.pdf?src-supplier=Mouser, ComponentLink15Description=https://www.verical.com/server-webapp/html/getDatasheet?partID=353664&src-supplier=Verical, ComponentLink15URL=https://www.verical.com/server-webapp/html/getDatasheet?partID=353664&src-supplier=Verical, ComponentLink16Description=http://capacitoredge.kemet.com/capedge2/DataSheet?pn=C0603C106M9PAC7867&src-supplier=Avnet, ComponentLink16URL=http://capacitoredge.kemet.com/capedge2/DataSheet?pn=C0603C106M9PAC7867&src-supplier=Avnet, ComponentLink17Description=http://www.farnell.com/datasheets/2315129.pdf?src-supplier=Distrelec, ComponentLink17URL=http://www.farnell.com/datasheets/2315129.pdf?src-supplier=Distrelec, ComponentLink18Description=http://www.kemet.com/kemet/web/homepage/kechome.nsf/file/Commercial%20Ceramic%20Chips%20X5R%20Dielectric/$file/KEM_C1006_X5R_SMD.pdf?src-supplier=Element14, ComponentLink18URL=http://www.kemet.com/kemet/web/homepage/kechome.nsf/file/Commercial%20Ceramic%20Chips%20X5R%20Dielectric/$file/KEM_C1006_X5R_SMD.pdf?src-supplier=Element14, ComponentLink19Description=http://www.farnell.com/datasheets/2315129.pdf?src-supplier=TME, ComponentLink19URL=http://www.farnell.com/datasheets/2315129.pdf?src-supplier=TME, ComponentLink20Description=http://www.farnell.com/datasheets/2315129.pdf?src-supplier=TTI, ComponentLink20URL=http://www.farnell.com/datasheets/2315129.pdf?src-supplier=TTI, ComponentLink21Description=http://www.farnell.com/datasheets/2315129.pdf?src-supplier=Quest, ComponentLink21URL=http://www.farnell.com/datasheets/2315129.pdf?src-supplier=Quest, Depth=0.8mm, Height=0.8mm, Length=1.6mm, Manufacturer Part Number=C0603C106M9PACTU, Mount="Surface Mount", Packaging="Tape and Reel", Pricing 1="1=0.49, 10=0.34, 100=0.2042, 500=0.1531, 1000=0.1293 (USD)", Radiation Hardening=No, Stock 1=97190, Supplier 1=Digi-Key, Termination=SMD/SMT
C6 C14 C19 C20 C21 C22 C24 C25 C26 C28 C29 C30 C31 C36 C37 C38: library part VJ0603Y104JXXAC, "CAP CER 0.1uF 0603- SMD/SMT .1UF 25V 5% 0603", Capacitance=100nF, Case/Package=0603, Case Code (Metric)=1608, Dielectric=X7R, Manufacturer="Vishay Vitramon", Max Operating Temperature=125°C, Min Operating Temperature=-55°C, Package Quantity=4000, Supplier Part Number 1=720-1545-1-ND, Tolerance=5%, Voltage Rating=25V, Case Code (Imperial)=0603, ComponentLink1Description=http://www.vishay.com/docs/45199/vjcommercialseries.pdf?src-supplier=Digi-Key, ComponentLink1URL=http://www.vishay.com/docs/45199/vjcommercialseries.pdf?src-supplier=Digi-Key, Depth=0.8mm, Length=1.6mm, Manufacturer Part Number=VJ0603Y104JXXAC, Mount="Surface Mount", Packaging="Tape and Reel", Pricing 1="1=0.34, 10=0.233, 100=0.1397, 500=0.1048, 1000=0.0885 (USD)", Radiation Hardening=No, Stock 1=126786, Supplier 1=Digi-Key, Termination=SMD/SMT, Thickness=0.036inch, Voltage Rating (DC)=25V, Width=0.031inch
C8 C9: library part CBR06C220JAGAC, "CAP CER 22PF 0603 250V C0G/NP0", Case/Package=0603, Case Code (Metric)=1608, Dielectric=C0G, Dielectric Material=Ceramic, Manufacturer=KEMET, Max Operating Temperature=125°C, Min Operating Temperature=-55°C, Package Quantity=1, Supplier Part Number 1=399-6187-1-ND, Temperature Coefficient=30ppm/°C, Tolerance=5%, Voltage=250V, Capacitance=22pF, Case Code (Imperial)=0603, ComponentLink1Description=http://www.farnell.com/datasheets/1446011.pdf?src-supplier=Element14, ComponentLink1URL=http://www.farnell.com/datasheets/1446011.pdf?src-supplier=Element14, ComponentLink2Description=http://uk.rs-online.com/webdocs/1528/0900766b81528b9f.pdf?src-supplier=RSComponents, ComponentLink2URL=http://uk.rs-online.com/webdocs/1528/0900766b81528b9f.pdf?src-supplier=RSComponents, ComponentLink3Description=https://search.kemet.com/component-edge/download/datasheet/CBR06C220JAGAC.pdf?src-supplier=Digi-Key, ComponentLink3URL=https://search.kemet.com/component-edge/download/datasheet/CBR06C220JAGAC.pdf?src-supplier=Digi-Key, ComponentLink4Description=https://api.kemet.com/component-edge/download/datasheet/CBR06C220JAGAC.pdf?src-supplier=Digi-Key, ComponentLink4URL=https://api.kemet.com/component-edge/download/datasheet/CBR06C220JAGAC.pdf?src-supplier=Digi-Key, Depth=0.8mm, Height=0.8mm, Length=1.6mm, Manufacturer Part Number=CBR06C220JAGAC, Mount="Surface Mount", Packaging="Tape and Reel", Pricing 1="1=0.98, 10=0.773, 100=0.5796, 500=0.4379, 1000=0.3864 (USD)", Radiation Hardening=No, REACH SVHC="No SVHC", Stock 1=22390, Supplier 1=Digi-Key, Termination=SMD/SMT, Thickness=0.034inch, Voltage Rating=250V, Voltage Rating (DC)=250V, Weight=7.1E-05oz, Width=0.031inch
C10: library part CBR04C249B5GAC, "CAP CER 2.4pF 0402 50V C0G 0.1pF SMD 0402 125°C Paper T/R", Capacitance=2.4pF, Case/Package=0402, Case Code (Metric)=1005, Manufacturer=KEMET, Max Operating Temperature=125°C, Supplier Part Number 1=399-16068-1-ND, Voltage Rating=50V, Case Code (Imperial)=0402, ComponentLink1Description=http://www.farnell.com/datasheets/1446011.pdf?src-supplier=Element14, ComponentLink1URL=http://www.farnell.com/datasheets/1446011.pdf?src-supplier=Element14, ComponentLink2Description=http://www.farnell.com/datasheets/2761969.pdf?src-supplier=Farnell, ComponentLink2URL=http://www.farnell.com/datasheets/2761969.pdf?src-supplier=Farnell, Manufacturer Part Number=CBR04C249B5GAC, Packaging="Cut Tape", Pricing 1="1=0.18, 10=0.125, 100=0.0635, 500=0.0434, 1000=0.0384, 2500=0.0367, 5000=0.0334 (USD)", REACH SVHC="No SVHC", Stock 1=6688, Supplier 1=Digi-Key, Voltage Rating (DC)=50V
C11: library part CBR04C309B5GAC, "CAP CER 3PF 0402 50V NP0", Case/Package=0402, Case Code (Metric)=1005, Dielectric=C0G, Manufacturer=KEMET, Max Operating Temperature=125°C, Min Operating Temperature=-55°C, Package Quantity=10000, Supplier Part Number 1=399-13245-1-ND, Voltage Rating=50V, Capacitance=3pF, Case Code (Imperial)=0402, ComponentLink1Description=http://www.mouser.com/ds/2/212/KEM_C1030_CBR_SMD-1101233.pdf?src-supplier=Mouser, ComponentLink1URL=http://www.mouser.com/ds/2/212/KEM_C1030_CBR_SMD-1101233.pdf?src-supplier=Mouser, ComponentLink2Description=http://www.kemet.com/Lists/ProductCatalog/Attachments/490/KEM_C1030_CBR_SMD.pdf?src-supplier=Digi-Key, ComponentLink2URL=http://www.kemet.com/Lists/ProductCatalog/Attachments/490/KEM_C1030_CBR_SMD.pdf?src-supplier=Digi-Key, Height=0.5mm, Length=0.039inch, Manufacturer Part Number=CBR04C309B5GAC, Mount="Surface Mount", Packaging="Tape and Reel", Pricing 1="1=0.19, 10=0.137, 100=0.0646, 500=0.0453, 1000=0.0375, 2500=0.0349, 5000=0.0319 (USD)", Stock 1=1768, Supplier 1=Digi-Key, Termination=SMD/SMT, Thickness=0.022inch, Voltage Rating (DC)=50V, Weight=2.3E-05oz, Width=0.02inch
C12 C13: library part CBR06C689BAGAC, "CAP CER 6.8PF 0603 250V C0G/NP0", Capacitance=6.8pF, Case/Package=0603, Case Code (Metric)=1608, Manufacturer=KEMET, Max Operating Temperature=125°C, Min Operating Temperature=-55°C, Package Quantity=1, Supplier Part Number 1=399-8744-1-ND, Voltage Rating=250V, Case Code (Imperial)=0603, ComponentLink1Description=https://search.kemet.com/component-edge/download/datasheet/CBR06C689BAGAC.pdf?src-supplier=Digi-Key, ComponentLink1URL=https://search.kemet.com/component-edge/download/datasheet/CBR06C689BAGAC.pdf?src-supplier=Digi-Key, ComponentLink2Description=https://api.kemet.com/component-edge/download/datasheet/CBR06C689BAGAC.pdf?src-supplier=Digi-Key, ComponentLink2URL=https://api.kemet.com/component-edge/download/datasheet/CBR06C689BAGAC.pdf?src-supplier=Digi-Key, Length=0.063inch, Manufacturer Part Number=CBR06C689BAGAC, Mount="Surface Mount", Packaging="Tape and Reel", Pricing 1="1=0.78, 10=0.549, 100=0.3614, 500=0.2677, 1000=0.2275 (USD)", Stock 1=20, Supplier 1=Digi-Key, Thickness=0.034inch, Width=0.031inch
C17 C23 C27: library part 293D106X96R3A2TE3, "CAP TANT 10UF 1206 6.3V 10%", Case/Package=1206, Case Code (Metric)=3216, Dielectric Material=Tantalum, ESR (Equivalent Series Resistance)=3.4R, Leakage Current=600nA, Manufacturer="Vishay Sprague", Max Operating Temperature=125°C, Min Operating Temperature=-55°C, Package Quantity=1, Ripple Current=150mA, Supplier Part Number 1=718-1126-1-ND, Tolerance=10%, Voltage=6.3V, Capacitance=10uF, Case Code (Imperial)=1206, Category=Capacitors, ComponentLink1Description=http://www.vishay.com/docs/40002/293d.pdf?src-supplier=Avnet, ComponentLink1URL=http://www.vishay.com/docs/40002/293d.pdf?src-supplier=Avnet, ComponentLink2Description=http://www.farnell.com/datasheets/2045658.pdf?src-supplier=Element14, ComponentLink2URL=http://www.farnell.com/datasheets/2045658.pdf?src-supplier=Element14, ComponentLink3Description=http://documents.rs-components.com/techlib://itc_doclist_GB.htm?stockno=6843913&src-supplier=RSComponents, ComponentLink3URL=http://documents.rs-components.com/techlib://itc_doclist_GB.htm?stockno=6843913&src-supplier=RSComponents, ComponentLink4Description=https://www.alliedelec.com/m/d/7dc9f301682605e5c5665c787edb7bb9.pdf?src-supplier=Allied+Electronics, ComponentLink4URL=https://www.alliedelec.com/m/d/7dc9f301682605e5c5665c787edb7bb9.pdf?src-supplier=Allied+Electronics, ComponentLink5Description=http://www.vishay.com/docs/40002/293d.pdf?src-supplier=Digi-Key, ComponentLink5URL=http://www.vishay.com/docs/40002/293d.pdf?src-supplier=Digi-Key, ComponentLink6Description=http://www.mouser.com/ds/2/427/293d-239871.pdf?src-supplier=Mouser, ComponentLink6URL=http://www.mouser.com/ds/2/427/293d-239871.pdf?src-supplier=Mouser, ComponentLink7Description=http://www.vishay.com/docs/40002/293d.pdf?src-supplier=Avnet+Europe, ComponentLink7URL=http://www.vishay.com/docs/40002/293d.pdf?src-supplier=Avnet+Europe, ComponentLink8Description=http://www.farnell.com/datasheets/438417.pdf?src-supplier=Element14, ComponentLink8URL=http://www.farnell.com/datasheets/438417.pdf?src-supplier=Element14, Depth=1.6mm, Dissipation Factor=6%, Features="General Purpose", Height=1.6mm, Height - Seated (Max)=0.071inch, Lead Free="Lead Free", Length=3.2mm, Manufacturer Part Number=293D106X96R3A2TE3, Mount="Surface Mount,PCB", Packaging="Tape and Reel", Polarity=Polar, Pricing 1="1=0.3, 10=0.212, 100=0.127, 500=0.0952, 1000=0.0804 (USD)", Q Factor=6, Radiation Hardening=No, REACH SVHC=Unknown, Stock 1=57716, Supplier 1=Digi-Key, Termination=SMD/SMT, Voltage Rating=6.3V, Voltage Rating (DC)=6.3V, Width=1.6mm
C34 C43 C44: library part VJ0603Y473JXXCW1BC, "CAP CER 47nF 0603 25 V ±5 % Tolerance X7R SMT Multilayer Ceramic Chip Capacitor", Case/Package=0603, Case Code (Metric)=1608, Dielectric=X7R, Dielectric Material=Tantalum, Manufacturer="Vishay Vitramon", Max Operating Temperature=125°C, Min Operating Temperature=-55°C, Package Quantity=4000, Supplier Part Number 1=720-1696-1-ND, Tolerance=5%, Voltage Rating=25V, Capacitance=47nF, Case Code (Imperial)=0603, ComponentLink1Description=http://www.vishay.com/docs/28548/vjw1bcbascomseries.pdf?src-supplier=Future+Electronics, ComponentLink1URL=http://www.vishay.com/docs/28548/vjw1bcbascomseries.pdf?src-supplier=Future+Electronics, Depth=0.8mm, Height=0.95mm, Lead Free="Lead Free", Length=1.6mm, Manufacturer Part Number=VJ0603Y473JXXCW1BC, Mount="Surface Mount", Packaging="Tape and Reel", Pricing 1="1=0.19, 10=0.137, 100=0.0643, 500=0.0451, 1000=0.0373 (USD)", Radiation Hardening=No, Stock 1=4000, Supplier 1=Digi-Key, Termination=SMD/SMT, Voltage Rating (DC)=25V, Width=0.8mm
C39 C40: library part 251R14S330GV4T, "CAP CER 33PF 0603 250V C0G/NP0", Case/Package=0603, Case Code (Metric)=1608, Dielectric=C0G, Dielectric Material=Ceramic, Manufacturer=Johanson, Max Operating Temperature=125°C, Min Operating Temperature=-55°C, Package Quantity=4000, Supplier Part Number 1=712-1341-1-ND, Temperature Coefficient=30ppm/°C, Tolerance=2%, Voltage Rating=250V, Capacitance=33pF, Case Code (Imperial)=0603, ComponentLink1Description=http://www.farnell.com/datasheets/1731432.pdf?src-supplier=Element14, ComponentLink1URL=http://www.farnell.com/datasheets/1731432.pdf?src-supplier=Element14, ComponentLink2Description=http://www.farnell.com/datasheets/1318610.pdf?src-supplier=Element14, ComponentLink2URL=http://www.farnell.com/datasheets/1318610.pdf?src-supplier=Element14, ComponentLink3Description=http://www.farnell.com/datasheets/321205.pdf?src-supplier=Farnell, ComponentLink3URL=http://www.farnell.com/datasheets/321205.pdf?src-supplier=Farnell, ComponentLink4Description=http://www.mouser.com/ds/2/611/JTI-CAT-MLCC-HighQ-516212.pdf?src-supplier=Mouser, ComponentLink4URL=http://www.mouser.com/ds/2/611/JTI-CAT-MLCC-HighQ-516212.pdf?src-supplier=Mouser, Depth=0.81mm, Height=0.89mm, Length=0.062inch, Manufacturer Part Number=251R14S330GV4T, Mount="Surface Mount", Number of Pins=2, Packaging="Tape and Reel", Pricing 1="1=0.56, 10=0.394, 100=0.2596, 500=0.1923, 1000=0.1634 (USD)", REACH SVHC=Unknown, Stock 1=29771, Supplier 1=Digi-Key, Termination=SMD/SMT, Thickness=0.035inch, Voltage Rating (DC)=250V, Width=0.032inch
C42: library part C0805C106K8PACTU, "CAP CER 10UF 0805 10V X5R", Case/Package=0805, Case Code (Metric)=2012, Dielectric=X5R, Dielectric Material=Ceramic, Manufacturer=KEMET, Max Operating Temperature=85°C, Min Operating Temperature=-55°C, Package Quantity=1, Supplier Part Number 1=399-4925-1-ND, Tolerance=10%, Voltage=10V, Capacitance=10uF, Case Code (Imperial)=0805, ComponentLink1Description=http://www.farnell.com/datasheets/2739827.pdf?src-supplier=Element14, ComponentLink1URL=http://www.farnell.com/datasheets/2739827.pdf?src-supplier=Element14, ComponentLink2Description=http://www.farnell.com/datasheets/40889.pdf?src-supplier=Element14, ComponentLink2URL=http://www.farnell.com/datasheets/40889.pdf?src-supplier=Element14, Contact Plating=Tin,Matte, Depth=1.25mm, Dissipation Factor=10%, Height=1.25mm, Length=2mm, Manufacturer Part Number=C0805C106K8PACTU, Mount="Surface Mount", Number of Pins=2, Packaging="Tape and Reel", Radiation Hardening=No, REACH SVHC="No SVHC", Stock 1=697432, Supplier 1=Digi-Key, Termination=SMD/SMT, Thickness=0.055inch, Voltage Rating=10V, Voltage Rating (DC)=10V, Width=1.2mm
D1: library part 1N5819HW-7-F, "DIODE SCHOTTKY 40V 1A SOD123", Average Rectified Current=1A, Capacitance=110pF, Case/Package=SOD-123-2, Forward Voltage=450mV, Manufacturer=Diodes, Max Forward Surge Current (Ifsm)=25A, Max Operating Temperature=125°C, Max Power Dissipation=450mW, Max Repetitive Reverse Voltage (Vrrm)=40V, Min Operating Temperature=-65°C, Package Quantity=3000, Peak Reverse Current=50uA, Supplier Part Number 1=1N5819HW-FDICT-ND, ComponentLink1Description=http://www.diodes.com/datasheets/ds30217.pdf?src-supplier=Future+Electronics, ComponentLink1URL=http://www.diodes.com/datasheets/ds30217.pdf?src-supplier=Future+Electronics, ComponentLink2Description=https://www.diodes.com/assets/Datasheets/ds30217.pdf?src-supplier=Digi-Key, ComponentLink2URL=https://www.diodes.com/assets/Datasheets/ds30217.pdf?src-supplier=Digi-Key, ComponentLink3Description=http://www.farnell.com/datasheets/2238341.pdf?src-supplier=Element14, ComponentLink3URL=http://www.farnell.com/datasheets/2238341.pdf?src-supplier=Element14, ComponentLink4Description=http://www.jameco.com/Jameco/Products/ProdDS/1538419.pdf?src-supplier=Jameco, ComponentLink4URL=http://www.jameco.com/Jameco/Products/ProdDS/1538419.pdf?src-supplier=Jameco, ComponentLink5Description=http://www.farnell.com/datasheets/2238341.pdf?src-supplier=Avnet, ComponentLink5URL=http://www.farnell.com/datasheets/2238341.pdf?src-supplier=Avnet, ComponentLink6Description=http://www.farnell.com/datasheets/2238341.pdf?src-supplier=Avnet+Europe, ComponentLink6URL=http://www.farnell.com/datasheets/2238341.pdf?src-supplier=Avnet+Europe, Contact Plating=Tin,Matte, Current Rating=1A, Element Configuration=Single, Forward Current=1A, Height=1.25mm, Lead Free="Lead Free", Length=2.85mm, Manufacturer Part Number=1N5819HW-7-F, Max Reverse Voltage (DC)=40V, Number of Pins=2, Output Current=1A, Packaging="Tape and Reel", Peak Non-Repetitive Surge Current=25A, Polarity=Standard, Radiation Hardening=No, REACH SVHC="No SVHC", Stock 1=454743, Supplier 1=Digi-Key, Termination=SMD/SMT, Voltage Rating (DC)=40V, Weight=0.000353oz, Width=1.7mm
D4: library part LTST-C193TBKT-5A, "LED BLUE 0603 CLEAR CHIP SMD", Case/Package=0603, Case Code (Metric)=1608, Color=Blue, Forward Current=20mA, Forward Voltage=2.8V, Lens Color=Colorless, Manufacturer="Vishay Lite-On", Max Operating Temperature=80°C, Min Operating Temperature=-20°C, Package Quantity=1, Power Dissipation=76mW, Reverse Voltage=5V, Supplier Part Number 1=160-1827-1-ND, Test Current=5mA, Case Code (Imperial)=0603, ComponentLink1Description=http://www.mouser.com/ds/2/239/Lite-On-LTST-C193TBKT-5A-187386.pdf?src-supplier=Mouser, ComponentLink1URL=http://www.mouser.com/ds/2/239/Lite-On-LTST-C193TBKT-5A-187386.pdf?src-supplier=Mouser, ComponentLink2Description=https://media.digikey.com/pdf/Data%20Sheets/Lite-On%20PDFs/LTST-C193TBKT-5A.pdf?src-supplier=Digi-Key, ComponentLink2URL=https://media.digikey.com/pdf/Data%20Sheets/Lite-On%20PDFs/LTST-C193TBKT-5A.pdf?src-supplier=Digi-Key, ComponentLink3Description=https://www.verical.com/server-webapp/html/getDatasheet?partID=293056&src-supplier=Verical, ComponentLink3URL=https://www.verical.com/server-webapp/html/getDatasheet?partID=293056&src-supplier=Verical, ComponentLink4Description=http://uk.rs-online.com/webdocs/0dc0/0900766b80dc0554.pdf?src-supplier=RSComponents, ComponentLink4URL=http://uk.rs-online.com/webdocs/0dc0/0900766b80dc0554.pdf?src-supplier=RSComponents, ComponentLink5Description=http://www1.futureelectronics.com/doc/LITE-ON/LTST-C193TBKT-5A.pdf?src-supplier=Future+Electronics, ComponentLink5URL=http://www1.futureelectronics.com/doc/LITE-ON/LTST-C193TBKT-5A.pdf?src-supplier=Future+Electronics, Depth=0.8mm, Dominant Wavelength=475nm, Height=0.35mm, Illumination Color=Blue, Lead Free="Lead Free", Length=1.6mm, Lens Style=Diffused,Colorless,Rectangular,Clear, Lens Transparency=Clear, Luminous Intensity=15mcd, Manufacturer Part Number=LTST-C193TBKT-5A, Mount="Surface Mount", Number of Elements=1, Number of LEDs=1, Number of Pins=2, Packaging="Tape and Reel", Pricing 1="1=0.45, 10=0.32, 100=0.1424, 500=0.0997, 1000=0.0819, 2500=0.0712 (USD)", Radiation Hardening=No, Stock 1=114316, Supplier 1=Digi-Key, Viewing Angle=130°, Width=0.8mm
D5: library part LTST-C194KGKT, "LED GREEN 0603 574nm 2-Pin Chip LED T/R", Case/Package=0603, Case Code (Metric)=1608, Color=Green, Forward Current=30mA, Forward Voltage=2.4V, Lens Color=Colorless, Manufacturer="Vishay Lite-On", Max Operating Temperature=85°C, Min Operating Temperature=-30°C, Package Quantity=3000, Power Dissipation=75mW, Reverse Voltage=5V, Supplier Part Number 1=160-1834-1-ND, Test Current=20mA, Case Code (Imperial)=0603, ComponentLink1Description=http://optoelectronics.liteon.com/upload/download/DS22-2010-0197/LTST-C194KGKT.PDF?src-supplier=Digi-Key, ComponentLink1URL=http://optoelectronics.liteon.com/upload/download/DS22-2010-0197/LTST-C194KGKT.PDF?src-supplier=Digi-Key, ComponentLink2Description=https://www.verical.com/server-webapp/html/getDatasheet?partID=708771&src-supplier=Verical, ComponentLink2URL=https://www.verical.com/server-webapp/html/getDatasheet?partID=708771&src-supplier=Verical, Depth=0.8mm, Dominant Wavelength=576.5nm, Height=0.35mm, Illumination Color=Green, Lead Free="Lead Free", Length=1.6mm, Lens Style=Diffused,Colorless,Rectangular, Lens Transparency=Clear, Luminous Intensity=112mcd, Manufacturer Part Number=LTST-C194KGKT, Mount="Surface Mount", Number of Elements=1, Number of LEDs=1, Number of Pins=2, Packaging="Tape and Reel", Power Rating=75mW, Pricing 1="1=0.39, 10=0.283, 100=0.1256, 500=0.0879, 1000=0.0722, 2500=0.0628 (USD)", Radiation Hardening=No, Stock 1=36702, Supplier 1=Digi-Key, Viewing Angle=130°, Width=0.8mm
L1 L3: library part LQW18AN4N3D00D, "IND SMD 4.3nH 0603 850mA FIXED 59 MOHM", Case/Package=0603, Case Code (Metric)=1608, Current Rating=850mA, DC Resistance (DCR)=59mR, Inductance=4.3nH, Manufacturer=Murata, Max Operating Temperature=125°C, Min Operating Temperature=-55°C, Package Quantity=4000, Self Resonant Frequency=6GHz, Supplier Part Number 1=490-1161-1-ND, Test Frequency=100MHz, Case Code (Imperial)=0603, ComponentLink1Description=http://uk.rs-online.com/webdocs/1256/0900766b81256268.pdf?src-supplier=RSComponents, ComponentLink1URL=http://uk.rs-online.com/webdocs/1256/0900766b81256268.pdf?src-supplier=RSComponents, ComponentLink2Description=http://www.murata.com/~/media/webrenewal/support/library/catalog/products/inductor/chip/o05e.ashx?src-supplier=Digi-Key, ComponentLink2URL=http://www.murata.com/~/media/webrenewal/support/library/catalog/products/inductor/chip/o05e.ashx?src-supplier=Digi-Key, ComponentLink3Description=https://search.murata.co.jp/Ceramy/image/img/P02/JELF243A-0024.pdf?src-supplier=Digi-Key, ComponentLink3URL=https://search.murata.co.jp/Ceramy/image/img/P02/JELF243A-0024.pdf?src-supplier=Digi-Key, Composition=Wirewound, Core Material=Non-Magnetic,Ferrite, DC Current=850mA, Depth=1mm, Height=0.8mm, Height - Seated (Max)=0.039inch, Lead Free="Lead Free", Length=1.6mm, Manufacturer Part Number=LQW18AN4N3D00D, Max DC Current=850mA, Military Standard=Not, Mount="Surface Mount", Packaging="Tape and Reel", Pricing 1="1=0.17, 10=0.155, 100=0.1035, 500=0.0863, 1000=0.0725 (USD)", Q Factor=35, Radiation Hardening=No, Shielding=Unshielded, Stock 1=13187, Supplier 1=Digi-Key, Termination=SMD/SMT, Weight=0.000106oz, Width=0.8mm
L2: library part L-07C2N2SV6T, "IND SMD 2.2NH 0402 300MA 160 MOHM", Case/Package=0402, Case Code (Metric)=1005, Current Rating=300mA, DC Resistance (DCR)=160mR, Inductance=2.2nH, Manufacturer=Johanson, Max Operating Temperature=100°C, Min Operating Temperature=-40°C, Package Quantity=1, Self Resonant Frequency=12GHz, Supplier Part Number 1=712-1414-1-ND, Test Frequency=100MHz, Case Code (Imperial)=0402, ComponentLink1Description=http://www.farnell.com/datasheets/1168792.pdf?src-supplier=Element14, ComponentLink1URL=http://www.farnell.com/datasheets/1168792.pdf?src-supplier=Element14, Core Material=Ceramic, DC Current=300mA, Depth=0.6mm, Height=0.5mm, Height - Seated (Max)=0.024inch, Length=1.1mm, Manufacturer Part Number=L-07C2N2SV6T, Max DC Current=300mA, Military Standard=Not, Mount="Surface Mount", Number of Pins=2, Packaging="Tape and Reel", Pricing 1="1=0.1, 10=0.047, 100=0.0311, 500=0.0259, 1000=0.0217, 2500=0.0186 (USD)", Q Factor=8, Radiation Hardening=No, REACH SVHC="No SVHC", Shielding=Unshielded, Stock 1=253343, Supplier 1=Digi-Key, Termination=SMD/SMT, Width=0.5mm
Q1: library part ABM8-12.000MHZ-20-B1U-T, "CRYSTAL SMD 12MHz ±10ppm (Tol) ±10ppm (Stability) 20pF FUND 120Ohm 4-Pin Ultra Mini-CSMD T/R", Manufacturer=Abracon, Supplier Part Number 1=535-14963-1-ND, ComponentLink1Description=http://datasheet.octopart.com/ABM8-12.000MHZ-20-B1U-T-Abracon-datasheet-103059652.pdf?src-supplier=Sager+Electronics, ComponentLink1URL=http://datasheet.octopart.com/ABM8-12.000MHZ-20-B1U-T-Abracon-datasheet-103059652.pdf?src-supplier=Sager+Electronics, Manufacturer Part Number=ABM8-12.000MHZ-20-B1U-T, Pricing 1="1=0.57, 10=0.473, 50=0.4258, 100=0.3784, 500=0.3595 (USD)", Stock 1=970, Supplier 1=Digi-Key
Q2: library part ABM8-26.000MHZ-10-1-U-T, "CRYSTAL SMD 26MHz 3.2mm ±10ppm (Tol) ±10ppm (Stability) 10pF FUND 50Ohm 4-Pin Ultra Mini-CSMD T/R", Case/Package=CSMD, ESR (Equivalent Series Resistance)=50R, Frequency Stability=10ppm, Load Capacitance=10pF, Manufacturer=Abracon, Max Operating Temperature=60°C, Min Operating Temperature=-10°C, Package Quantity=1000, Supplier Part Number 1=300-8230-1-ND, ComponentLink1Description=http://www.abracon.com/Resonators/abm8.pdf?src-supplier=Avnet, ComponentLink1URL=http://www.abracon.com/Resonators/abm8.pdf?src-supplier=Avnet, ComponentLink2Description=https://www.verical.com/server-webapp/html/getDatasheet?partID=719798&src-supplier=Verical, ComponentLink2URL=https://www.verical.com/server-webapp/html/getDatasheet?partID=719798&src-supplier=Verical, ComponentLink3Description=http://www.abracon.com/Resonators/abm8.pdf?src-supplier=Digi-Key, ComponentLink3URL=http://www.abracon.com/Resonators/abm8.pdf?src-supplier=Digi-Key, ComponentLink4Description=https://abracon.com/Support/PackageDrawing/Resonators/ABM8.PDF?src-supplier=Digi-Key, ComponentLink4URL=https://abracon.com/Support/PackageDrawing/Resonators/ABM8.PDF?src-supplier=Digi-Key, Composition=Ceramic, Depth=2.5mm, Frequency=26MHz, Frequency Tolerance=10ppm, Height=0.031inch, Lead Free="Lead Free", Length=3.2mm, Manufacturer Part Number=ABM8-26.000MHZ-10-1-U-T, Mount="Surface Mount", Number of Pins=4, Packaging="Tape and Reel", Pricing 1="1=1.09, 10=0.961, 50=0.8988, 100=0.7942, 500=0.7524 (USD)", REACH SVHC="No SVHC", Series Resistance=50R, Stock 1=88292, Supplier 1=Digi-Key, Termination=SMD/SMT, Tolerance=10ppm, Width=2.5mm
Q3: library part ABM8W-12.2880MHZ-8-B1U-T3, "CRYSTAL SMD 12.288MHZ Iot Optimized 12.29MHZ 8PF Crystal", Manufacturer=Abracon, Supplier Part Number 1=ABM8W-12.2880MHZ-8-B1U-T3-ND, ComponentLink1Description=http://datasheet.octopart.com/ABM8W-12.2880MHZ-8-B1U-T3-Abracon-datasheet-101745424.pdf?src-supplier=Sager+Electronics, ComponentLink1URL=http://datasheet.octopart.com/ABM8W-12.2880MHZ-8-B1U-T3-Abracon-datasheet-101745424.pdf?src-supplier=Sager+Electronics, Manufacturer Part Number=ABM8W-12.2880MHZ-8-B1U-T3, Pricing 1="3000=0.36 (USD)", Stock 1=0, Supplier 1=Digi-Key